# EAGLE board Kb_left (EAGLE 9.6.2)
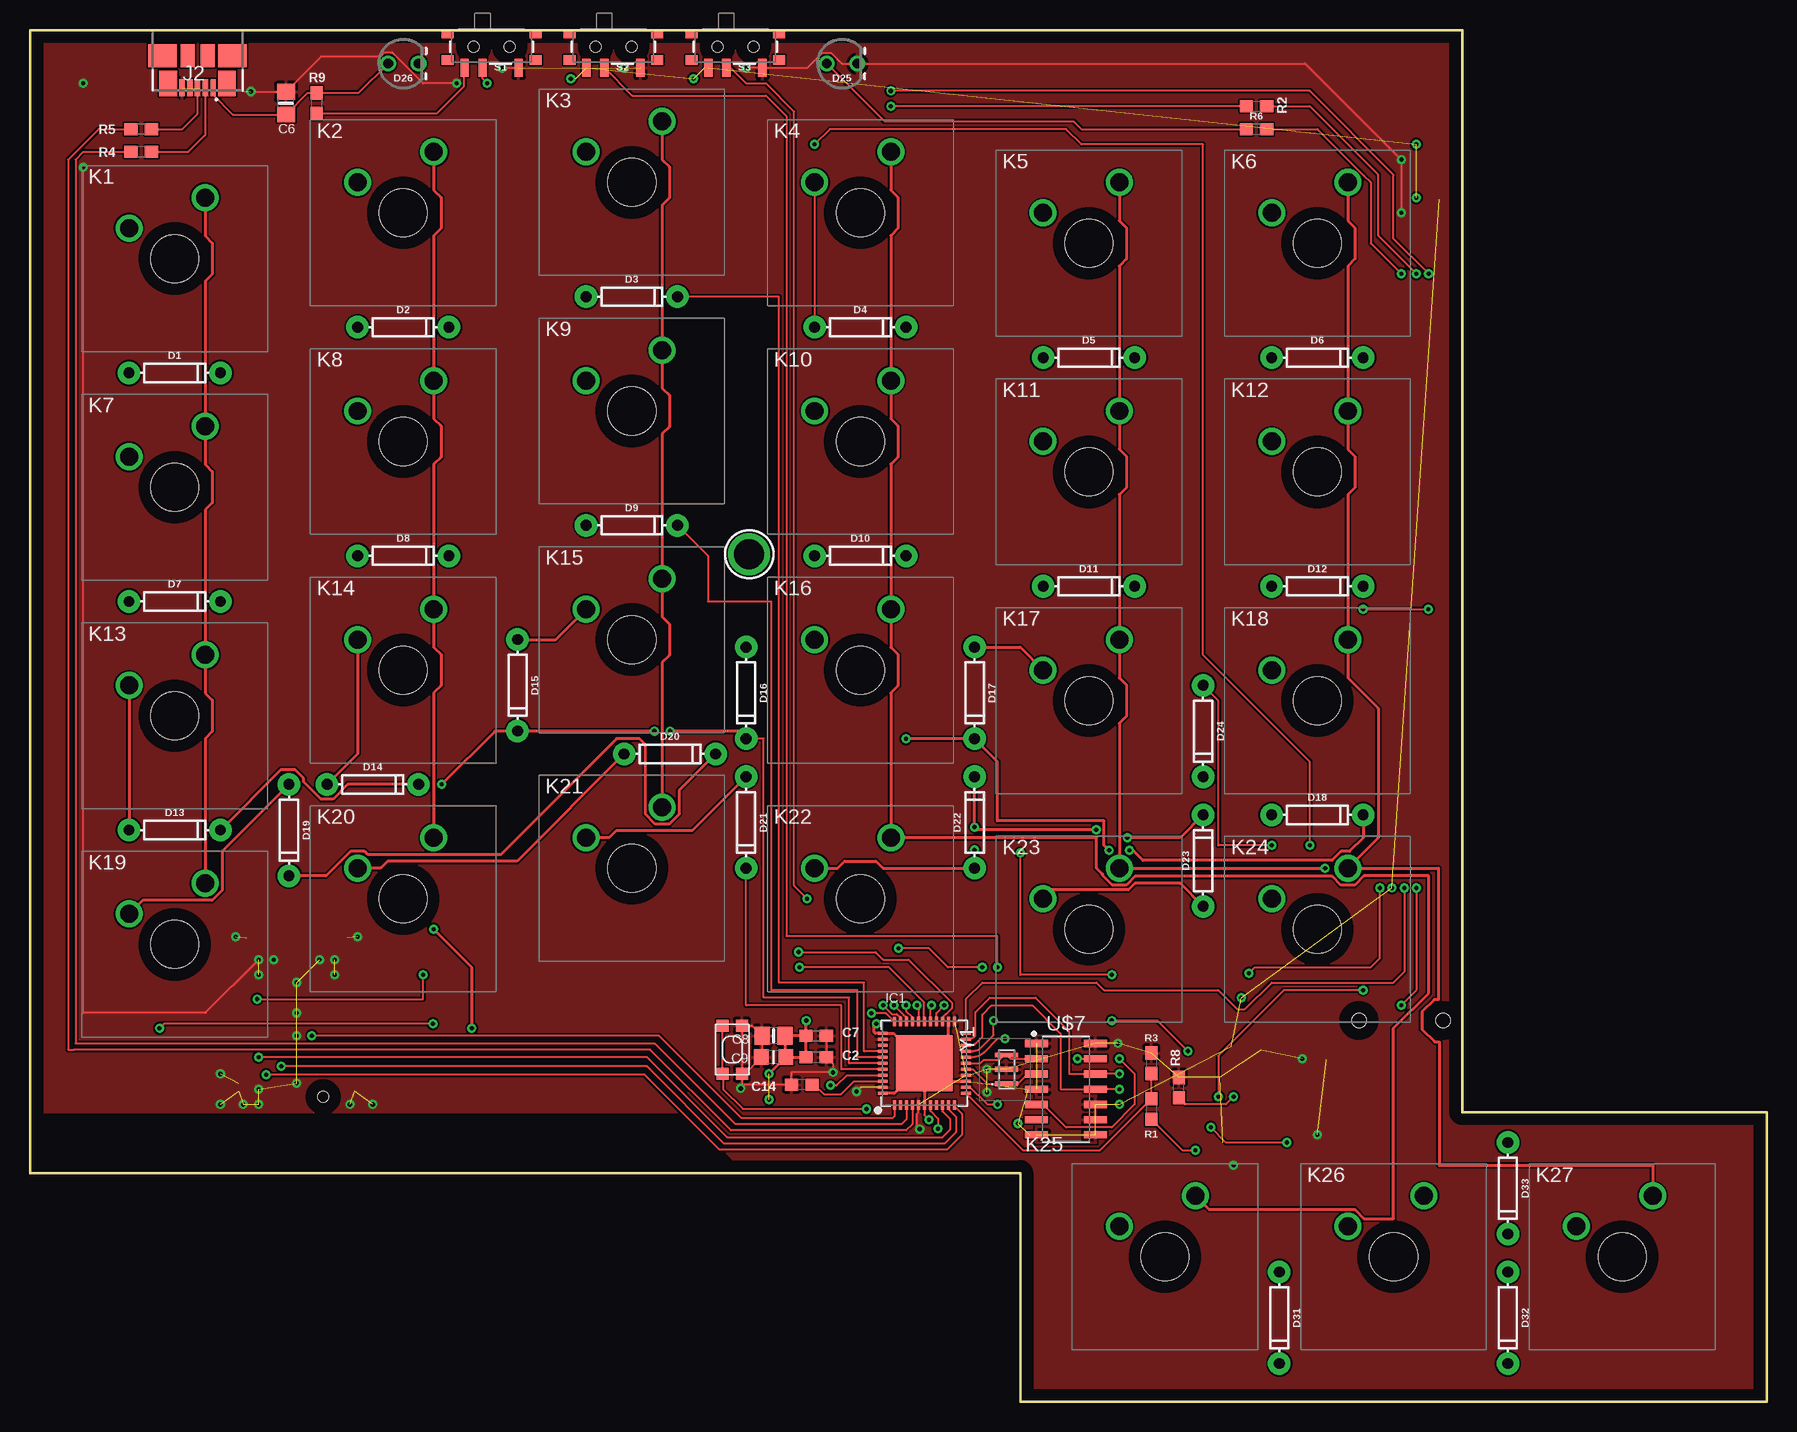
[diagram p0: board, top side]
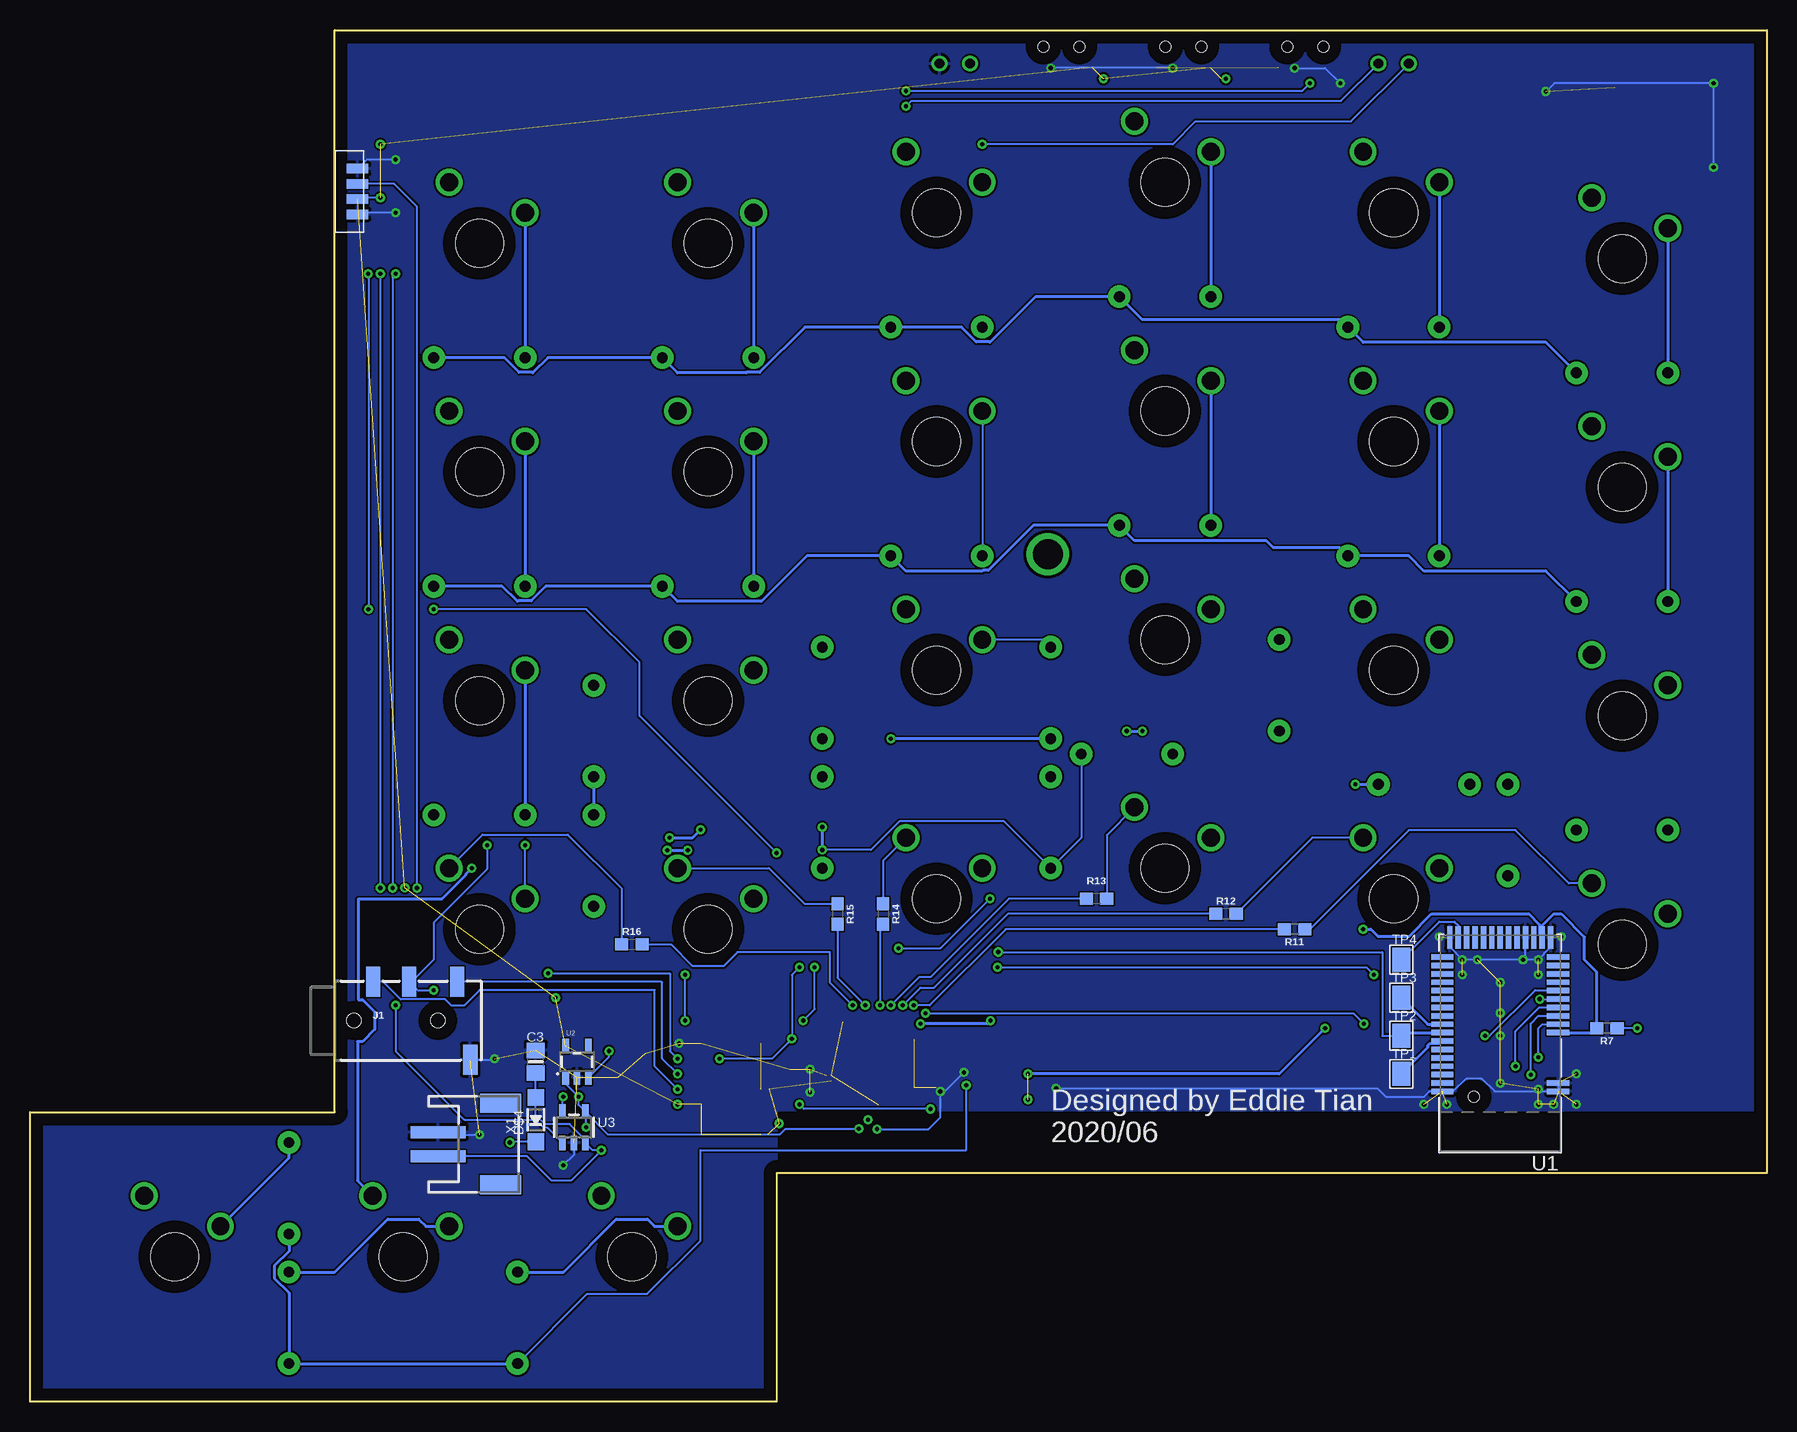
[diagram p1: board, bottom side, seen from below]

Size 144.78 x 114.3 mm. Coordinates in mm from the lower left corner, seen from the top.
Outline: 0,114.3 0,19.05 82.55,19.05 82.55,0 144.78,0 144.78,24.13 119.38,24.13 119.38,114.3 0,114.3
Copper layers (1*16): Top 0.035mm / dielectric 1.5mm / Bottom 0.035mm
Design rules "default": minimum track width 6mil, minimum drill 0.35mm, track to track 6mil, track to pad 6mil, pad to pad 6mil, via to via 6mil, smd to smd 6mil, copper to edge 40mil, drill to drill 6mil, minimum pad ring 10mil, minimum via ring 8mil, stop-mask expansion 4mil, vias tented up to drill 0mil, thermal gap 10mil

## Footprints (pad centres in the part's own frame; a part is rotated, then mirrored left to right if it is on the bottom)
0603-NO = smd 1.1 x 1: 1 -0.85,0; 2 0.85,0
0805-NO = smd 1.3 x 1.5: 1 -0.95,0; 2 0.95,0
_0805MP = smd 1.2 x 1.3: 1 -1.016,0; 2 1.016,0
DIODE-1N4148 = drill 0.9 pad 1.88: A -3.81,0; C 3.81,0
LED_3MM-NS = drill 0.813: A -1.27,0; K 1.27,0
SOD-123 = smd 1.4 x 1.4: A 1.85,0; C -1.85,0
TQFN44_7MM = smd 0.25 x 0.8: 1 -2.5,-3.475; 2 -2,-3.475; 3 -1.5,-3.475; 4 -1,-3.475; 5 -0.5,-3.475; 6 0,-3.475; 7 0.5,-3.475; 8 1,-3.475; 9 1.5,-3.475; 10 2,-3.475; 11 2.5,-3.475; 23 2.5,3.475; 24 2,3.475; 25 1.5,3.475; 26 1,3.475; 27 0.5,3.475; 28 0,3.475; 29 -0.5,3.475; 30 -1,3.475; 31 -1.5,3.475; 32 -2,3.475; 33 -2.5,3.475 | smd 0.8 x 0.25: 12 3.475,-2.5; 13 3.475,-2; 14 3.475,-1.5; 15 3.475,-1; 16 3.475,-0.5; 17 3.475,0; 18 3.475,0.5; 19 3.475,1; 20 3.475,1.5; 21 3.475,2; 22 3.475,2.5; 34 -3.475,2.5; 35 -3.475,2; 36 -3.475,1.5; 37 -3.475,1; 38 -3.475,0.5; 39 -3.475,0; 40 -3.475,-0.5; 41 -3.475,-1; 42 -3.475,-1.5; 43 -3.475,-2; 44 -3.475,-2.5 | smd 4.7 x 4.7: THERMAL 0,0
AUDIO_JACK_3.5MM_TRRS_SMD_RA = smd 1.2 x 2.5: EARTH 11.3,-3.25; RING1 6.2,3.25; RING2 3.2,3.25; TIP 10.2,3.25 | hole 1.2: 1.6,0; 8.6,0
47346-0001 = smd 0.45 x 1.38: 1 1.3,-4.81; 2 0.65,-4.81; 3 0,-4.81; 4 -0.65,-4.81; 5 -1.3,-4.81 | smd 1.475 x 2.1: 6 -2.453,-4.45; 7 2.453,-4.45 | smd 1.175 x 1.9: 8 0.838,-2.15; 9 -0.838,-2.15 | smd 2.375 x 1.9: 10 2.913,-2.15; 11 -2.913,-2.15
MXSWITCHPLATE = drill 1.499: P$1 -3.81,2.54; P$2 2.54,5.08 | hole 3.988: 0,0
0603 = smd 1.1 x 1: 1 -0.85,0; 2 0.85,0
SWITCH_SPST_SMD_A = smd 0.7 x 1.5: 1 -2.25,-1.75; 2 -0.75,-1.75; 3 2.25,-1.75 | smd 1 x 0.6: GND1 -3.65,1; GND3 3.65,1 | smd 1 x 0.8: GND2 -3.65,-1.1; GND4 3.65,-1.1 | hole 0.9: -1.5,0; 1.5,0
KMR2 = smd 1 x 1: 1 2,0.8; 2 2,-0.8; 3 -2,0.8; 4 -2,-0.8
PAD-1.5X2.0 = smd 1.5 x 2: P$1 0,0
BLE_MODULE_RAYTAC_MDBT40 = smd 1.85 x 0.45: 1 -4.825,4; 2 -4.825,3.3; 3 -4.825,-0.9; 4 -4.825,-1.6; 5 -4.825,-2.3; 6 -4.825,-3; 7 -4.825,-3.7; 8 -4.825,-4.4; 9 -4.825,-5.1; 10 -4.825,-5.8; 11 -4.825,-6.5; 12 -4.825,-7.2; 26 4.825,-7.2; 27 4.825,-6.5; 28 4.825,-5.8; 29 4.825,-5.1; 30 4.825,-4.4; 31 4.825,-3.7; 32 4.825,-3; 33 4.825,-2.3; 34 4.825,-1.6; 35 4.825,-0.9; 36 4.825,-0.2; 37 4.825,0.5; 38 4.825,1.2; 39 4.825,1.9; 40 4.825,2.6; 41 4.825,3.3; 42 4.825,4 | smd 0.45 x 1.85: 13 -4.2,-8.825; 14 -3.5,-8.825; 15 -2.8,-8.825; 16 -2.1,-8.825; 17 -1.4,-8.825; 18 -0.7,-8.825; 19 0,-8.825; 20 0.7,-8.825; 21 1.4,-8.825; 22 2.1,-8.825; 23 2.8,-8.825; 24 3.5,-8.825; 25 4.2,-8.825 | hole 0.9: 2.2,4.45
SOT23-5 = smd 0.55 x 1.2: 1 -0.95,-1.3; 2 0,-1.3; 3 0.95,-1.3; 4 0.95,1.3; 5 -0.95,1.3
TSOP75456 = smd 0.8 x 1.8: $GND 1.905,-0.762; GND -1.905,-0.762; OUT 0.635,-0.762; VCC -0.635,-0.762
SOIC127P600X175-14N = smd 1.901 x 0.599: 1 -2.455,3.81; 2 -2.455,2.54; 3 -2.455,1.27; 4 -2.455,0; 5 -2.455,-1.27; 6 -2.455,-2.54; 7 -2.455,-3.81; 8 2.455,-3.81; 9 2.455,-2.54; 10 2.455,-1.27; 11 2.455,0; 12 2.455,1.27; 13 2.455,2.54; 14 2.455,3.81
MOUNTINGHOLE_2.5_PLATED = drill 2.5 pad 3.2: P$1 0,0
JSTPH2 = smd 1 x 4.6: 1 -1,-3.7; 2 1,-3.7 | smd 1.6 x 3.4: NC1 -3.4,1.5; NC2 3.4,1.5
CSTNE10M0G55Z000R0 = smd 0.4 x 1.9: 1 1.2,0; 2 0,0; 3 -1.2,0

## Placement (x,y rotation side)
C2  1uF  [0603-NO]  65.53,28.7 0 top
C3  10µF  [0805-NO]  102.62,28.32 90 bottom
C6  10µF  [0805-NO]  21.34,108.2 90 top
C7  1uF  [0603-NO]  65.53,30.48 0 top
C8  10µF  [0805-NO]  61.98,30.48 180 top
C9  10uF  [_0805MP]  61.98,28.7 180 top
C14  1uF  [0603-NO]  64.33,26.42 180 top
D1  200mA/100V/1V  [DIODE-1N4148]  12.06,85.73 0 top
D2  200mA/100V/1V  [DIODE-1N4148]  31.11,89.53 0 top
D3  200mA/100V/1V  [DIODE-1N4148]  50.16,92.08 0 top
D4  200mA/100V/1V  [DIODE-1N4148]  69.22,89.53 0 top
D5  200mA/100V/1V  [DIODE-1N4148]  88.27,87 0 top
D6  200mA/100V/1V  [DIODE-1N4148]  107.31,87 0 top
D7  200mA/100V/1V  [DIODE-1N4148]  12.06,66.67 0 top
D8  200mA/100V/1V  [DIODE-1N4148]  31.11,70.48 0 top
D9  200mA/100V/1V  [DIODE-1N4148]  50.16,73.03 0 top
D10  200mA/100V/1V  [DIODE-1N4148]  69.22,70.48 0 top
D11  200mA/100V/1V  [DIODE-1N4148]  88.27,67.94 0 top
D12  200mA/100V/1V  [DIODE-1N4148]  107.31,67.94 0 top
D13  200mA/100V/1V  [DIODE-1N4148]  12.06,47.62 0 top
D14  200mA/100V/1V  [DIODE-1N4148]  28.57,51.44 0 top
D15  200mA/100V/1V  [DIODE-1N4148]  40.64,59.69 270 top
D16  200mA/100V/1V  [DIODE-1N4148]  59.69,59.05 270 top
D17  200mA/100V/1V  [DIODE-1N4148]  78.74,59.05 270 top
D18  200mA/100V/1V  [DIODE-1N4148]  107.31,48.89 0 top
D19  200mA/100V/1V  [DIODE-1N4148]  21.59,47.62 270 top
D20  200mA/100V/1V  [DIODE-1N4148]  53.34,53.97 0 top
D21  200mA/100V/1V  [DIODE-1N4148]  59.69,48.26 270 top
D22  200mA/100V/1V  [DIODE-1N4148]  78.74,48.26 90 top
D23  200mA/100V/1V  [DIODE-1N4148]  97.79,45.08 90 top
D24  200mA/100V/1V  [DIODE-1N4148]  97.79,55.88 270 top
D25  [LED_3MM-NS]  67.69,111.51 0 top
D26  [LED_3MM-NS]  31.11,111.51 0 top
D31  200mA/100V/1V  [DIODE-1N4148]  104.14,6.98 270 top
D32  200mA/100V/1V  [DIODE-1N4148]  123.19,6.98 270 top
D33  200mA/100V/1V  [DIODE-1N4148]  123.19,17.78 270 top
D$4  MBR120  [SOD-123]  102.62,23.49 90 bottom
IC1  ATMEGA32U4-MU  [TQFN44_7MM]  74.55,28.19 0 top
J1  AUDIO_JACK_TRRSSMD_RA  [AUDIO_JACK_3.5MM_TRRS_SMD_RA]  119.38,31.75 0 bottom
J2  47346-0001  [47346-0001]  13.97,114.3 0 top
K1  MXSWITCHPLATE  [MXSWITCHPLATE]  12.06,95.25 0 top
K2  MXSWITCHPLATE  [MXSWITCHPLATE]  31.11,99.06 0 top
K3  MXSWITCHPLATE  [MXSWITCHPLATE]  50.16,101.6 0 top
K4  MXSWITCHPLATE  [MXSWITCHPLATE]  69.22,99.06 0 top
K5  MXSWITCHPLATE  [MXSWITCHPLATE]  88.27,96.52 0 top
K6  MXSWITCHPLATE  [MXSWITCHPLATE]  107.31,96.52 0 top
K7  MXSWITCHPLATE  [MXSWITCHPLATE]  12.06,76.2 0 top
K8  MXSWITCHPLATE  [MXSWITCHPLATE]  31.11,80.01 0 top
K9  MXSWITCHPLATE  [MXSWITCHPLATE]  50.16,82.55 0 top
K10  MXSWITCHPLATE  [MXSWITCHPLATE]  69.22,80.01 0 top
K11  MXSWITCHPLATE  [MXSWITCHPLATE]  88.27,77.47 0 top
K12  MXSWITCHPLATE  [MXSWITCHPLATE]  107.31,77.47 0 top
K13  MXSWITCHPLATE  [MXSWITCHPLATE]  12.06,57.15 0 top
K14  MXSWITCHPLATE  [MXSWITCHPLATE]  31.11,60.96 0 top
K15  MXSWITCHPLATE  [MXSWITCHPLATE]  50.16,63.5 0 top
K16  MXSWITCHPLATE  [MXSWITCHPLATE]  69.22,60.96 0 top
K17  MXSWITCHPLATE  [MXSWITCHPLATE]  88.27,58.42 0 top
K18  MXSWITCHPLATE  [MXSWITCHPLATE]  107.31,58.42 0 top
K19  MXSWITCHPLATE  [MXSWITCHPLATE]  12.06,38.1 0 top
K20  MXSWITCHPLATE  [MXSWITCHPLATE]  31.11,41.91 0 top
K21  MXSWITCHPLATE  [MXSWITCHPLATE]  50.16,44.45 0 top
K22  MXSWITCHPLATE  [MXSWITCHPLATE]  69.22,41.91 0 top
K23  MXSWITCHPLATE  [MXSWITCHPLATE]  88.27,39.37 0 top
K24  MXSWITCHPLATE  [MXSWITCHPLATE]  107.31,39.37 0 top
K25  MXSWITCHPLATE  [MXSWITCHPLATE]  94.61,12.06 0 top
K26  MXSWITCHPLATE  [MXSWITCHPLATE]  113.67,12.06 0 top
K27  MXSWITCHPLATE  [MXSWITCHPLATE]  132.72,12.06 0 top
R1  100k  [0603]  93.47,24.38 270 top
R2  1K  [0603-NO]  102.23,107.95 0 top
R3  100k  [0603]  93.47,28.19 270 top
R4  22  [0603-NO]  9.27,104.14 180 top
R5  22  [0603-NO]  9.27,106.05 180 top
R6  2.2k  [0603]  102.23,106.05 0 top
R7  100k  [0603]  13.34,31.11 180 bottom
R8  10K\  [0603-NO]  95.76,26.16 90 top
R9  100K  [0603-NO]  23.88,108.2 270 top
R11  100k  [0603]  39.37,39.37 180 bottom
R12  100k  [0603]  45.09,40.64 180 bottom
R13  100k  [0603]  55.88,41.91 180 bottom
R14  100k  [0603]  73.66,40.64 270 bottom
R15  100k  [0603]  77.47,40.64 270 bottom
R16  100k  [0603]  94.61,38.1 0 bottom
S1  Power  [SWITCH_SPST_SMD_A]  38.48,112.9 0 top
S2  bt_mode  [SWITCH_SPST_SMD_A]  48.64,112.9 0 top
S3  irmode  [SWITCH_SPST_SMD_A]  58.8,112.9 0 top
SW1  SPST_TACT-KMR2  [KMR2]  58.55,29.34 90 top
TP1  SWCLK  [PAD-1.5X2.0]  30.48,27.3 0 bottom
TP2  SWDIO  [PAD-1.5X2.0]  30.48,30.48 0 bottom
TP3  SWDIO  [PAD-1.5X2.0]  30.48,33.66 0 bottom
TP4  DFU  [PAD-1.5X2.0]  30.48,36.83 0 bottom
U1  MBT40  [BLE_MODULE_RAYTAC_MDBT40]  22.23,29.84 180 bottom
U2  3.3V  [SOT23-5]  99.19,28.32 0 bottom
U3  MCP73831  [SOT23-5]  99.44,22.86 0 bottom
U4  TSOP75456  [TSOP75456]  118.24,100.84 90 bottom
U$7  MCP2120  [SOIC127P600X175-14N]  86.36,26.03 0 top
U$11  MOUNTINGHOLE2.5  [MOUNTINGHOLE_2.5_PLATED]  59.94,70.61 0 top
X1  JSTPH  [JSTPH2]  107.06,21.46 270 bottom
Y1  CSTNE10M0G55Z000R0  [CSTNE10M0G55Z000R0]  81.41,27.69 270 top

## Library data of the parts
C2 C3 C6-C9 C14 D$4 IC1 R2 R4 R5 R8 R9 TP1-TP4 U1 U3 X1 = microbuilder
D1-D24 D31-D33 = SparkFun-DiscreteSemi; PROD_ID: DIO-08378
D25 D26 = SparkFun-LED
J1 = SparkFun-Connectors; PROD_ID: CONN-10676; SF_ID: PRT-12639
J2 = SamacSys_Parts; DESCRIPTION: Micro USB B Receptacle Bottom Mount Assy Molex Right Angle SMT Type B Version 2.0 Micro USB Connector Socket, 30 V ac, 1A 47352 MICRO-USB; HEIGHT: mm; MANUFACTURER_NAME: Molex; MANUFACTURER_PART_NUMBER: 47346-0001; MOUSER_PART_NUMBER: 538-47346-0001; MOUSER_PRICE-STOCK: https://www.mouser.co.uk/ProductDetail/Molex/47346-0001?qs=c2CV6XM0DweJBWaSeyWeCw%3D%3D
K1-K27 U4 U$7 = Kb parts
R1 R3 R7 R11-R16 = SparkFun-Resistors; PROD_ID: RES-07828
R6 = SparkFun-Resistors; PROD_ID: RES-08272
S1-S3 = SparkFun-Switches; PROD_ID: SWCH-10651; SF_SKU: COM-10860
SW1 = adafruit
U2 = SparkFun-IC-Power; PROD_ID: VREG-12457
U$11 = microbuilder; BOM: EXCLUDE
Y1 = SamacSys_Parts; DESCRIPTION: Piezoelectric Ceramic Resonator 10.0000MHZ 33PF SMD Wide temperature range; HEIGHT: 0.8mm; MANUFACTURER_NAME: Murata Electronics; MANUFACTURER_PART_NUMBER: CSTNE10M0G55Z000R0; MOUSER_PART_NUMBER: 81-CSTNE10M0G55Z000R; MOUSER_PRICE-STOCK: https://www.mouser.com/Search/Refine.aspx?Keyword=81-CSTNE10M0G55Z000R

## Nets
4_SWDIO/RST: IC1.25 TP2.P$1 U1.35
7_BLE_IRQ: IC1.1 U1.8
8_BLE_CS: IC1.28 U1.7
+3V3: C2.1 C7.1 C8.1 C9.1 IC1.6 IC1.14 IC1.24 IC1.34 IC1.44 R7.2 S2.1 S3.1 U1.3 U1.14 U2.5 U4.VCC U$7.1 U$7.4 U$7.7 U$7.8 U$7.9 U$7.10
AREF: C14.1 IC1.42
BATLEV: IC1.12 R1.1 R3.2
BLINKY: IC1.22 R6.2
COL0: IC1.26 R16.2
COL1: IC1.27 R15.2
COL2: IC1.29 R14.2
COL3: IC1.30 R13.2
COL4: IC1.31 R12.2
COL5: IC1.32 R11.2
D+: IC1.4 R5.2
D-: IC1.3 R4.2
DCC: U1.15
DEC2: U1.41
DFU: TP4.P$1 U1.24
FCTRYRST: TP3.P$1 U1.34
GND: C2.2 C3.2 C6.2 C7.2 C8.2 C9.2 C14.2 D25.K IC1.5 IC1.15 IC1.23 IC1.35 IC1.43 J1.EARTH J2.5 R3.1 R8.2 S1.3 S2.3 S3.3 SW1.2 SW1.4 U1.1 U1.2 U1.13 U1.16 U1.25 U1.42 U2.2 U3.2 U4.$GND U4.GND U$7.14 X1.1 Y1.2
MISO: IC1.11 U1.5
MODE: IC1.18 S2.2 U$7.13
MOSI: IC1.10 U1.6
N$1: D26.K R2.1
N$2: IC1.33 R7.1
N$3: R2.2 U3.1
N$4: R8.1 U3.5
N$5: D25.A R6.1
N$6: J2.3 R5.1
N$7: K1.P$2 K7.P$2 K13.P$2 K19.P$2 R11.1
N$8: K2.P$2 K8.P$2 K14.P$2 K20.P$2 R12.1
N$9: K3.P$2 K9.P$2 K15.P$2 K21.P$2 R13.1
N$10: K4.P$2 K10.P$2 K16.P$2 K22.P$2 K25.P$2 R14.1
N$11: R9.2 S1.1
N$12: S1.2 U2.3
N$13: K5.P$2 K11.P$2 K17.P$2 K23.P$2 K26.P$2 R15.1
N$14: K6.P$2 K12.P$2 K18.P$2 K24.P$2 K27.P$2 R16.1
N$16: J2.2 R4.1
N$23: D1.A K1.P$1
N$24: D2.A K2.P$1
N$25: D3.A K3.P$1
N$26: D4.A K4.P$1
N$27: D5.A K5.P$1
N$28: D6.A K6.P$1
N$29: D12.A K12.P$1
N$30: D11.A K11.P$1
N$31: D10.A K10.P$1
N$32: D9.A K9.P$1
N$33: D8.A K8.P$1
N$34: D7.A K7.P$1
N$35: D13.A K13.P$1
N$36: D14.A K14.P$1
N$37: D15.A K15.P$1
N$38: D16.A K16.P$1
N$39: D17.A K17.P$1
N$40: D18.A K18.P$1
N$41: D24.A K24.P$1
N$42: D23.A K23.P$1
N$43: D22.A K22.P$1
N$44: D21.A K21.P$1
N$45: D20.A K20.P$1
N$46: D19.A K19.P$1
N$53: D33.A K27.P$1
N$54: D32.A K26.P$1
N$55: D31.A K25.P$1
N$64: U4.OUT U$7.5
N$65: U$7.6
ROW0: D1.C D2.C D3.C D4.C D5.C D6.C IC1.37
ROW1: D7.C D8.C D9.C D10.C D11.C D12.C IC1.38
ROW2: D13.C D14.C D15.C D16.C D17.C D18.C IC1.39
ROW3: D19.C D20.C D21.C D22.C D23.C D24.C IC1.40
ROW4: D31.C D32.C D33.C IC1.41
RST: IC1.13 SW1.1 SW1.3
RX: IC1.20 J1.RING2 U$7.11
SCK: IC1.9 U1.4
SIG_MODE: IC1.19 S3.2
SS: IC1.8
SWCLK: TP1.P$1 U1.36
TX: IC1.21 J1.TIP U$7.12
VBAT: C3.1 D$4.A R1.2 U3.3 X1.2
VBUS: C6.1 D26.A D$4.C IC1.7 J1.RING1 J2.1 R9.1 U2.1 U3.4
XTAL1: IC1.17 U$7.2 Y1.3
XTAL2: IC1.16 U$7.3 Y1.1

## Tracks (layer width: path | path; a pad name or v marks a point on that pad's centre or on a via)
4_SWDIO/RST  (via drill 0.35)
  Top 0.152: IC1.25 76.19,31.81 76.19,32.16 76.33,32.3 76.34,32.3 76.83,32.8 76.83,33.24 73.25,36.83 71.12,36.83 70.48,37.47 v64.07,37.47
  Bottom 0.152: TP2.P$1 32.06,30.48 32.06,37.47 v64.07,37.47
  Bottom 0.254: TP2.P$1 30.21,30.74 U1.35
7_BLE_IRQ  (via drill 0.35)
  Top 0.152: IC1.1 72.05,23.79 71.88,23.62 59.31,23.62 52.45,30.48 v23.5,30.48
  Bottom 0.152: v23.5,30.48 23.11,30.48 19.3,34.29 17.45,34.29 U1.8
8_BLE_CS  (via drill 0.35)
  Top 0.152: IC1.28 74.54,31.68 74.54,33.27 71.62,36.2 v64.14,36.2 | v32.77,35.56 32.77,33.54 v18.94,33.54
  Bottom 0.152: v18.94,33.54 U1.7 | v64.14,36.2 33.4,36.2 v32.77,35.56
+3V3  (via drill 0.35)  (18 unrouted)
  Top 0.152: 83.3,22.22 U$7.7 | IC1.6 74.55,23.88 v74.93,23.49 | 83.19,26.03 U$7.4 | 71.12,30.69 IC1.34 | v45.09,110.24 45.47,110.24 | S3.1 56.23,111.15
  Top 0.254: v33.66,39.37 36.83,36.2 v36.83,31.11 | v61.59,27.3 C9.1 | C9.1 62.93,28.77 C8.1 C7.1 | C9.1 C2.1 C7.1 | C7.1 64.68,31.72 v64.71,31.75 | v70.55,31.5 70.36,31.3 70.36,30.8 70.46,30.69 IC1.34 71.99,30.69 74.52,28.16 | 74.52,28.16 74.55,28.13 | 74.55,28.13 IC1.6 | 74.55,28.13 75.99,26.69 IC1.14 | 74.52,28.16 76.55,30.19 IC1.24 | 74.52,28.16 72.05,25.69 IC1.44
  Bottom 0.152: v115.57,100.33 117.35,100.33 U4.VCC
  Bottom 0.254: U1.3 14.55,30.74 R7.2 14.19,35.78 15.2,36.8 15.2,38.7 17.14,40.64 17.78,40.64 18.73,39.7 U1.14 18.92,38.87 18.92,39.71 19.85,40.64 27.95,40.64 29.82,38.77 32.41,38.77 33.01,39.37 v33.66,39.37 | v36.83,31.11 40.64,27.3 v61.59,27.3 | v64.71,31.75 64.96,31.5 v70.55,31.5
  other vias: 82.35,23.17 90.81,24.77 100.97,33.66 113.53,42.81 115.57,104.78 55.31,110.24 61.59,25.17
  pour Top: 83.82,30.48 83.82,21.59 88.9,21.59 88.9,30.48
AREF
  Top 0.152: C14.1 65.37,26.42 66.17,25.62 67.62,25.62 68.7,26.69 IC1.42
BATLEV
  Top 0.152: R3.2 R1.1 89.19,20.95 82.76,20.95 IC1.12
BLINKY  (via drill 0.35)
  Top 0.152: R6.2 107.32,106.05 111.21,102.16 111.21,102.15 111.76,101.6 111.76,96.52 v114.3,93.98 | v114.55,42.8 114.55,35.81 113.67,34.92 103.5,34.92 101.28,32.7 100.65,32.7 99.06,34.29 89.53,34.29 88.9,34.92 79.38,34.92 78.02,33.57 IC1.22
  Bottom 0.152: v114.3,93.98 114.55,93.73 v114.55,42.8
COL0  (via drill 0.35)
  Top 0.152: IC1.26 75.55,32.37 v76.2,33.02
  Bottom 0.152: R16.2 91.36,38.1 89.54,36.28 86.99,36.28 85.81,37.47 78.11,37.47 78.11,34.92 v76.2,33.02
COL1  (via drill 0.35)
  Top 0.152: IC1.27 75.05,32.91 v75.16,33.02
  Bottom 0.152: R15.2 77.47,35.33 v75.16,33.02
COL2  (via drill 0.35)
  Top 0.152: v73.93,33.02 74.05,32.91 IC1.29
  Bottom 0.152: R14.2 73.93,39.52 v73.93,33.02
COL3  (via drill 0.35)
  Top 0.152: v73.03,33.02 73.03,32.54 73.55,32.02 IC1.30
  Bottom 0.152: R13.2 63.18,41.91 69.69,35.4 70.64,35.4 v73.03,33.02
COL4  (via drill 0.35)
  Top 0.152: v72.03,33.02 72.75,32.3 72.77,32.3 73.05,32.02 IC1.31
  Bottom 0.152: R12.2 63.27,40.64 69.42,34.49 70.56,34.49 v72.03,33.02
COL5  (via drill 0.35)
  Top 0.152: v71.12,33.02 71.84,32.3 72.27,32.3 72.55,32.02 IC1.32
  Bottom 0.152: v71.12,33.02 69.79,33.02 63.44,39.37 R11.2
D+
  Top 0.152: IC1.4 73.55,23.13 73.03,22.61 58.42,22.61 51.69,29.34 3.81,29.34 3.68,29.34 3.17,29.34 3.17,103.5 5.71,106.05 R5.2
D-
  Top 0.152: IC1.3 73.05,23.52 72.64,23.11 58.8,23.11 52.07,29.84 3.81,29.84 3.81,103.5 4.45,104.14 R4.2
DFU
  Bottom 0.152: TP4.P$1 27.3,40 26.04,40 25.73,39.7 U1.24
FCTRYRST
  Bottom 0.254: TP3.P$1 28.27,31.45 U1.34
GND  (via drill 0.35)  (35 unrouted)
  Top 0.152: v18.41,109.17 21.32,109.17 C6.2 24.27,112.09 29.17,112.09 29.48,112.39 30.21,112.39 32.75,109.86 v35.56,109.86 | v59.69,111.12 59.72,111.15 S3.3 61.07,111.17 64.83,111.17 66.05,112.39 66.79,112.39 67.68,111.51 D25.K 106.3,111.51 v114.3,103.5 v114.3,99.06 | C7.2 C2.2 66.93,28.16 v66.93,27.43 63.48,27.43 C14.2 | SW1.4 59.59,27.34 C9.2 61.03,28.77 C8.2 60.17,31.34 SW1.2 SW1.4 | 63.48,26.19 C14.2 | SW1.4 59.35,26.2 v59.24,26.1 59.56,26.42 C14.2 | v19.05,36.83 14.61,32.38 4.45,32.38 v4.45,102.87 | 69.25,26.19 v68.9,25.84 | IC1.5 74.05,24.11 73.94,24 73.94,22.94 v74.17,22.71 | 78.37,27.19 IC1.15 | IC1.35 71.42,30.19 | S1.3 40.7,111.12 v39.37,111.12
  Bottom 0.152: v59.69,111.12 59.61,111.21 49.61,111.21 v49.53,111.12 | v114.3,103.5 116.71,103.5 U4.$GND | v114.3,99.06 117.35,99.06 U4.GND | v59.24,26.1 32.45,26.1 31.75,25.4 28.57,25.4 28.13,25.84 U1.42 26.16,25.84 25.06,26.94 23.79,26.94 22.69,25.84 U1.1 U1.2 | U1.13 18.02,37.89 18.55,37.36 18.55,37.33 v19.05,36.83 v20.32,36.83 | v74.17,22.71 69.9,22.71 68.9,23.72 v68.9,25.84 68.52,25.84 v66.93,27.43 | v20.32,36.83 v24.13,36.83 v25.4,36.83 25.9,37.33 25.9,37.36 26.43,37.89 U1.25 | v20.32,36.83 20.12,37.02 U1.16 | v39.37,111.12 36.83,111.12 v35.56,109.86 | U3.2 99.44,20.57 v100.33,19.68 | X1.1 110.52,22.22 v107.31,22.22 | J1.EARTH 106.12,28.5 v106.05,28.57 | v4.45,102.87 v4.45,109.86 17.73,109.86 v18.41,109.17
  other vias: 79.76,27.69 79.76,25.79 90.68,29.84 17.78,24.77 19.05,24.77 22.23,26.54 26.67,24.77 22.23,30.48 22.23,32.38 22.23,34.92 19.05,35.56 25.4,35.56 19.05,26.03 15.88,27.3 15.88,24.77 28.57,24.77 17.14,38.73 27.3,38.73
  pour Bottom: 0,114.3 0,24.26 82.55,24.26 82.55,0 144.78,0 144.78,24.13 119.38,24.13 119.38,114.3
  pour Top (rank 2): 0,114.3 0,24.13 53.98,24.13 54.61,24.13 59.05,19.68 82.55,19.68 82.55,0 144.78,0 144.78,24.13 119.38,24.13 119.38,114.3
MISO  (via drill 0.35)
  Top 0.152: IC1.11 77.05,24.61 77.67,23.99 77.67,22.24 76.44,21.01 57.48,21.01 51.25,27.24 v19.68,27.24
  Bottom 0.152: v19.68,27.24 19.68,31.5 19.04,32.14 U1.5
MODE  (via drill 0.35)
  Top 0.152: v81.28,30.23 80.67,30.23 79.56,29.12 arc-45 78.55,28.7 IC1.18 | v87.31,28.57 U$7.13 | v80.64,36.2 80.64,38.8 63.06,38.8 63.06,107.12 61.34,108.84 50.2,108.84 S2.2
  Bottom 0.152: v80.64,36.2 81.28,35.56 v81.28,30.23 82.93,28.57 v87.31,28.57
MOSI  (via drill 0.35)
  Top 0.152: IC1.10 76.55,24.37 77.17,23.75 77.17,22.45 76.23,21.51 57.87,21.51 51.44,27.94 v20.95,27.94
  Bottom 0.152: v20.95,27.94 20.95,30.86 18.97,32.84 U1.6
N$1  (via drill 0.35)
  Top 0.152: R2.1 v71.75,107.95
  Bottom 0.152: v71.75,107.95 71.31,108.39 35.5,108.39 D26.K
N$2  (via drill 0.35)
  Top 0.152: IC1.33 71.72,31.99 71.35,32.36 v70.13,32.36 | v33.59,31.5 13.97,31.5 13.78,31.5 11.18,31.5 v10.79,31.11
  Bottom 0.152: v70.13,32.36 34.46,32.36 v33.59,31.5 | v10.79,31.11 R7.1
N$3  (via drill 0.35)
  Top 0.152: v115.57,93.98 112.39,97.16 112.39,102.23 106.68,107.95 R2.2 | v114.3,33.02 115.57,34.29 v115.57,42.8
  Bottom 0.152: v115.57,42.8 v115.57,93.98 | U3.1 101.64,22.81 101.98,22.81 102.67,23.49 108.58,23.49 114.3,29.21 v114.3,33.02
N$4  (via drill 0.35)
  Top 0.152: v100.33,25.4 99.69,24.77 96.31,24.77 R8.1
  Bottom 0.152: U3.5 100.39,25.34 v100.33,25.4
N$5
  Top 0.152: D25.A 70.55,107.38 70.61,107.31 71.25,106.68 87,106.68 87.63,106.05 R6.1
N$6
  Top 0.152: R5.1 12.7,106.05 13.97,107.31 J2.3
N$7
  Top 0.254: K1.P$2 14.61,97.15 15.2,96.55 15.2,93.95 14.61,93.35 K7.P$2 14.61,78.1 15.2,77.5 15.2,74.9 14.61,74.3 K13.P$2 14.61,59.05 15.2,58.45 15.2,55.85 14.61,55.25 K19.P$2
  Bottom 0.152: K19.P$2 16.51,43.18 20.95,47.62 29.84,47.62 38.1,39.37 R11.1
N$8
  Top 0.254: K2.P$2 33.66,100.96 34.25,100.36 34.25,97.76 33.66,97.16 K8.P$2 33.66,81.91 34.25,81.31 34.25,78.71 33.66,78.11 K14.P$2 33.66,62.86 34.25,62.26 34.25,59.66 33.66,59.06 K20.P$2
  Bottom 0.152: K20.P$2 37.88,46.99 R12.1
N$9
  Top 0.254: K3.P$2 52.7,103.5 53.3,102.9 53.3,100.3 52.7,99.7 K9.P$2 52.7,84.45 53.3,83.85 53.3,81.25 52.7,80.65 K15.P$2 52.7,65.4 53.3,64.8 53.3,62.2 52.7,61.6 K21.P$2
  Bottom 0.152: K21.P$2 55.03,47.2 R13.1
N$10
  Top 0.254: K4.P$2 71.75,100.96 72.35,100.36 72.35,97.76 71.75,97.16 K10.P$2 71.75,81.91 72.35,81.31 72.35,78.71 71.75,78.11 K16.P$2 71.75,62.86 72.35,62.26 72.35,59.66 71.75,59.06 K22.P$2 88.9,46.99 88.9,44.45 89.4,43.95 89.4,43.87 90.22,43.05 91.39,43.05 92.11,43.77 108.55,43.77 109.27,43.05 110.44,43.05 111.2,43.81 116.59,43.81 116.59,34.04 113.67,31.11 113.67,15.24 111.2,15.24 110.44,16.01 98.29,16.01 K25.P$2
  Bottom 0.152: K22.P$2 73.66,45.08 R14.1
N$11
  Top 0.152: S1.1 36.17,111.09 36.17,109.6 33.92,107.35 R9.2
N$12  (via drill 0.35)
  Top 0.152: v116.59,93.98 113.67,96.9 113.67,102.23 106.68,109.22 v71.75,109.22 | v96.52,29.21 93.98,31.75 v90.17,31.75 | v90.17,35.56 82.55,35.56 v82.55,45.72 | v111.12,66.04 v116.56,66.04 | v38.1,109.86 37.73,110.22 S1.2
  Bottom 0.152: v116.56,66.04 116.56,93.96 v116.59,93.98 | v71.75,109.22 38.73,109.22 v38.1,109.86 | U2.3 96.52,28.74 v96.52,29.21 | v90.17,31.75 v90.17,35.56 | v82.55,45.72 93.98,57.15 93.98,61.59 98.42,66.04 v111.12,66.04
N$13  (via drill 0.35)
  Top 0.254: K5.P$2 90.81,98.42 91.4,97.82 91.4,95.22 90.81,94.62 K11.P$2 90.81,79.37 91.4,78.77 91.4,76.17 90.81,75.57 K17.P$2 90.81,60.32 91.4,59.72 91.4,57.12 90.81,56.52 K23.P$2 v107.95,44.45
  Bottom 0.152: K23.P$2 83.19,44.45 80.22,41.49 R15.1
  Bottom 0.254: v107.95,44.45 108.45,43.95 108.45,43.87 110.46,41.86 117.41,41.86 117.41,33.49 117.06,33.49 116.04,32.47 116.04,31.03 117.06,30.01 117.47,30.01 117.47,18.41 K26.P$2
N$14
  Top 0.254: K6.P$2 109.86,98.42 110.45,97.82 110.45,95.22 109.86,94.62 K12.P$2 109.86,79.37 110.45,78.77 110.45,76.17 109.86,75.57 K18.P$2 109.86,60.32 112.39,57.78 112.39,46.99 K24.P$2 117.41,44.45 117.41,33.49 117.06,33.49 116.04,32.47 116.04,31.03 117.09,29.97 117.47,29.97 117.47,19.68 135.25,19.68 K27.P$2
  Bottom 0.152: K24.P$2 107.06,47.24 99.95,47.24 95.47,42.76 R16.1
N$16
  Top 0.152: R4.1 13.21,104.14 14.54,105.47 14.62,105.55 J2.2
N$23
  Bottom 0.254: K1.P$1 D1.A
N$24
  Bottom 0.254: K2.P$1 D2.A
N$25
  Bottom 0.254: K3.P$1 D3.A
N$26
  Top 0.152: K4.P$1 D4.A
N$27
  Bottom 0.254: K5.P$1 D5.A
N$28
  Bottom 0.254: K6.P$1 D6.A
N$29
  Bottom 0.254: K12.P$1 D12.A
N$30
  Bottom 0.254: K11.P$1 D11.A
N$31
  Bottom 0.152: K10.P$1 D10.A
N$32
  Bottom 0.254: K9.P$1 D9.A
N$33
  Bottom 0.254: K8.P$1 D8.A
N$34
  Bottom 0.254: K7.P$1 D7.A
N$35
  Top 0.254: K13.P$1 D13.A
N$36
  Top 0.254: K14.P$1 27.3,53.97 D14.A
N$37
  Top 0.254: D15.A 43.81,63.5 K15.P$1
N$38
  Bottom 0.152: D16.A 60.33,63.5 K16.P$1
N$39
  Top 0.254: D17.A 82.55,62.86 K17.P$1
N$40
  Bottom 0.254: K18.P$1 D18.A
N$41  (via drill 0.35)
  Top 0.152: v103.5,46.36 99.06,46.36 99.06,58.42 D24.A
  Bottom 0.152: K24.P$1 v103.5,46.36
N$42
  Top 0.254: D23.A 95.89,43.18 92.09,43.18 91.56,42.64 85.19,42.64 K23.P$1
N$43
  Top 0.254: K22.P$1 67.32,44.45 67.92,45.05 70.51,45.05 71.11,44.45 D22.A
N$44
  Top 0.254: K21.P$1 48.27,46.99 48.87,47.59 55.21,47.59 D21.A
N$45
  Top 0.254: D20.A 40.6,45.05 29.82,45.05 29.22,44.45 K20.P$1
N$46
  Top 0.254: K19.P$1 9.39,41.78 15.19,41.78 16.01,42.6 16.01,45.85 D19.A
N$53
  Bottom 0.254: K27.P$1 123.19,20.32 D33.A
N$54
  Bottom 0.254: D32.A 119.37,10.79 114.96,15.2 112.37,15.2 111.77,14.6 K26.P$1
N$55
  Bottom 0.254: D31.A 100.32,10.79 95.91,15.2 93.32,15.2 92.72,14.6 K25.P$1
N$64  (via drill 0.35)
  Top 0.152: v112.52,42.8 112.52,36.96 111.76,36.2 102.11,36.2 v101.6,35.69 | v90.81,28.57 92.08,27.3 92.08,24.77 90.17,22.86 86.36,22.86 84.45,24.77 U$7.5
  Bottom 0.152: v101.6,35.69 91.44,35.69 91.44,29.21 v90.81,28.57 | v112.52,42.8 112.52,99.57 114.43,101.47 U4.OUT
ROW0
  Top 0.152: IC1.37 69.52,29.19 69.52,34.92 62.42,34.92 62.42,92.08 D3.C
  Bottom 0.254: D1.C 18.41,88.27 33.66,88.27 D2.C 35.56,90.17 52.07,90.17 D3.C 60.96,92.08 64.77,88.27 64.82,88.32 65.91,88.32 67.13,89.53 D4.C 80.19,89.53 83.95,85.78 85.04,85.78 85.09,85.73 90.81,85.73 D5.C 101.6,87 102.87,85.73 102.92,85.78 104.01,85.78 105.23,87 D6.C
ROW1
  Top 0.152: IC1.38 68.96,28.69 68.96,34.29 61.78,34.29 61.78,66.67 56.52,66.67 56.52,70.48 D9.C
  Bottom 0.254: D7.C 18.41,69.22 28.57,69.22 29.84,70.48 D8.C 35.61,71.17 41.15,71.17 41.73,71.75 52.7,71.75 D9.C 61.14,73.03 64.9,69.27 65.35,69.27 65.41,69.22 71.75,69.22 D10.C 80.01,70.48 83.82,66.67 90.81,66.67 D11.C 101.78,67.94 103,66.73 104.09,66.73 104.14,66.67 105.41,67.94 D12.C
ROW2  (via drill 0.35)
  Top 0.152: IC1.39 68.28,28.19 68.28,33.66 61.15,33.66 61.15,55.25 D16.C
  Top 0.254: D18.C 111.12,46.99 109.99,45.85 109.27,45.85 108.53,45.11 92.77,45.11 91.94,45.94 v91.66,45.94 | v89.95,45.94 89.53,46.36 89.53,48.39 80.64,48.39 80.64,53.34 D17.C v73.03,55.25 | D16.C 59.05,55.88 v53.36,55.88 | v52.05,55.88 D15.C 38.76,55.88 v34.31,51.44 | D14.C 26.49,51.44 25.27,50.22 24.26,50.22 22.81,51.67 22.81,51.94 22.09,52.65 20.9,52.65 D13.C
  Bottom 0.254: v91.66,45.94 v89.95,45.94 | v53.36,55.88 v52.05,55.88 | v34.31,51.44 D14.C | D16.C v73.03,55.25
ROW3  (via drill 0.35)
  Top 0.152: IC1.40 67.63,27.69 67.63,33.02 59.69,33.02 D21.C
  Top 0.254: D23.C 95.89,46.99 v91.46,46.99 | v88.88,47.65 78.97,47.65 v78.74,47.88 D22.C | D20.C 54.11,50.93 54.11,48.95 53.29,48.13 52.12,48.13 51.3,48.95 51.3,54.74 50.8,55.25 48.9,55.25 39.24,45.59 28.15,45.59 27.89,45.85 26.72,45.85 24.68,43.81 D19.C
  Bottom 0.152: v78.74,45.97 74.68,45.97 72.31,48.34 63.58,48.34 D21.C 57.15,46.99 D20.C
  Bottom 0.254: D24.C D23.C | v91.46,46.99 89.53,46.99 v88.88,47.65 | v78.74,47.88 v78.74,45.97
ROW4  (via drill 0.35)
  Top 0.152: v66.74,26.35 67.25,26.35 68.09,27.19 IC1.41
  Bottom 0.152: D31.C 98.34,8.98 93.34,8.98 88.9,13.42 88.9,20.95 66.74,20.95 v66.74,26.35
  Bottom 0.254: D33.C 123.19,12.52 124.41,11.3 124.41,10.29 123.19,9.07 D32.C D31.C
RST  (via drill 0.35)
  Top 0.152: SW1.1 SW1.3 57.78,27.3 57.78,26.03 59.44,24.38 v69.72,24.38 | v80.64,24.77 79.8,24.77 78.37,26.19 IC1.13
  Bottom 0.152: v80.64,24.77 80.26,24.38 v69.72,24.38
RX  (via drill 0.35)
  Top 0.152: v90.81,26.03 U$7.11 85.92,26.03 85.92,30.67 83.57,33.02 80.14,33.02 79.38,32.26 79.38,30.39 78.81,29.83 arc-45 78.55,29.72 IC1.20
  Bottom 0.152: v90.81,26.03 92.71,27.94 92.71,34.29 107.31,34.29 108.61,32.99 109.63,32.99 110.16,33.52 113.88,33.52 115.35,35 J1.RING2
SCK  (via drill 0.35)
  Top 0.152: IC1.9 76.05,24.2 76.67,23.57 76.67,22.66 76.02,22.01 58.13,22.01 51.44,28.7 v19.05,28.7
  Bottom 0.152: v19.05,28.7 19.05,31.11 18.72,31.45 U1.4
SIG_MODE  (via drill 0.35)
  Top 0.152: IC1.19 78.55,29.21 arc45 79.31,29.52 80.33,30.54 v80.33,31.75 | v79.38,36.2 76.52,36.2 74.93,37.78 v72.39,37.78 | v64.77,41.91 63.69,42.99 63.69,107.5 61.34,109.86 59.69,109.86 58.39,111.15 S3.2
  Bottom 0.152: v80.33,31.75 79.38,32.7 v79.38,36.2 | v72.39,37.78 68.9,37.78 v64.77,41.91
SWCLK
  Bottom 0.254: U1.36 27.25,29.85 28.09,29.85 28.25,29.69 28.25,29.53 TP1.P$1
TX  (via drill 0.35)
  Top 0.152: v90.81,27.3 U$7.12 86.61,27.3 86.61,30.86 83.82,33.66 80.01,33.66 78.8,32.45 78.81,32.45 78.81,30.48 arc-45 78.12,30.2 IC1.21
  Bottom 0.152: v90.81,27.3 92.08,28.57 92.08,34.92 92.15,35 J1.TIP
VBAT  (via drill 0.35)
  Top 0.152: R1.2 96.05,20.95 v97.16,20.95
  Bottom 0.152: X1.2 103.36,20.46 101.31,18.41 99.69,18.41 v97.16,20.95 97.89,20.95 U3.3 98.49,21.81 99.8,23.11 101.85,23.11 102.62,23.88 D$4.A C3.1
VBUS  (via drill 0.35)
  Top 0.152: IC1.7 75.05,24.23 75.69,23.59 v75.69,22.73 | v104.78,21.59 99.69,21.59 v98.42,22.86 | v111.12,34.29 104.53,34.29 99.06,28.82 v99.06,25.4 | v106.68,46.36 106.68,53.34 97.79,62.23 97.79,104.78 87.63,104.78 86.36,106.05 66.67,106.05 v65.41,104.78 | J2.1 15.27,108.89 16.91,107.25 C6.1 23.14,109.05 R9.1 27.39,109.05 D26.A
  Bottom 0.152: v75.69,22.73 81.81,22.73 82.29,22.25 96.58,22.25 98.42,24.09 | 98.42,24.09 U3.4 99.06,24.73 v99.06,25.4 100.14,26.48 U2.1 | D$4.C 104.72,21.64 v104.78,21.59 | v98.42,22.86 98.42,24.09 | J1.RING1 113.07,34.89 | 113.07,34.89 112.47,34.29 v111.12,34.29 | v106.68,46.36 106.68,44.37 111.12,39.92 111.12,36.83 113.07,34.89 | D26.A 34.67,106.68 47.62,106.68 49.53,104.78 v65.41,104.78
XTAL1
  Top 0.152: U$7.2 81.72,28.57 Y1.3 81.22,28.89 80.81,28.48 79.5,28.48 79.22,28.19 IC1.17
XTAL2
  Top 0.152: IC1.16 78.61,27.69 79.81,26.49 Y1.1 82.37,26.49 83.19,27.3 U$7.3

## Text on the board
bPlace: Designed by Eddie Tian / 2020/06